# Altium PCB Template.PcbDoc
Units mil, origin at the board's own origin, x right, y up, seen from the top; angles counter-clockwise.
Board outline 3025 x 2860 mil, 2 copper layers (Top Layer, Bottom Layer); 101 components, 46 nets, 314 pads, 0 vias.
Unrouted connection lines stored in the file: 204.
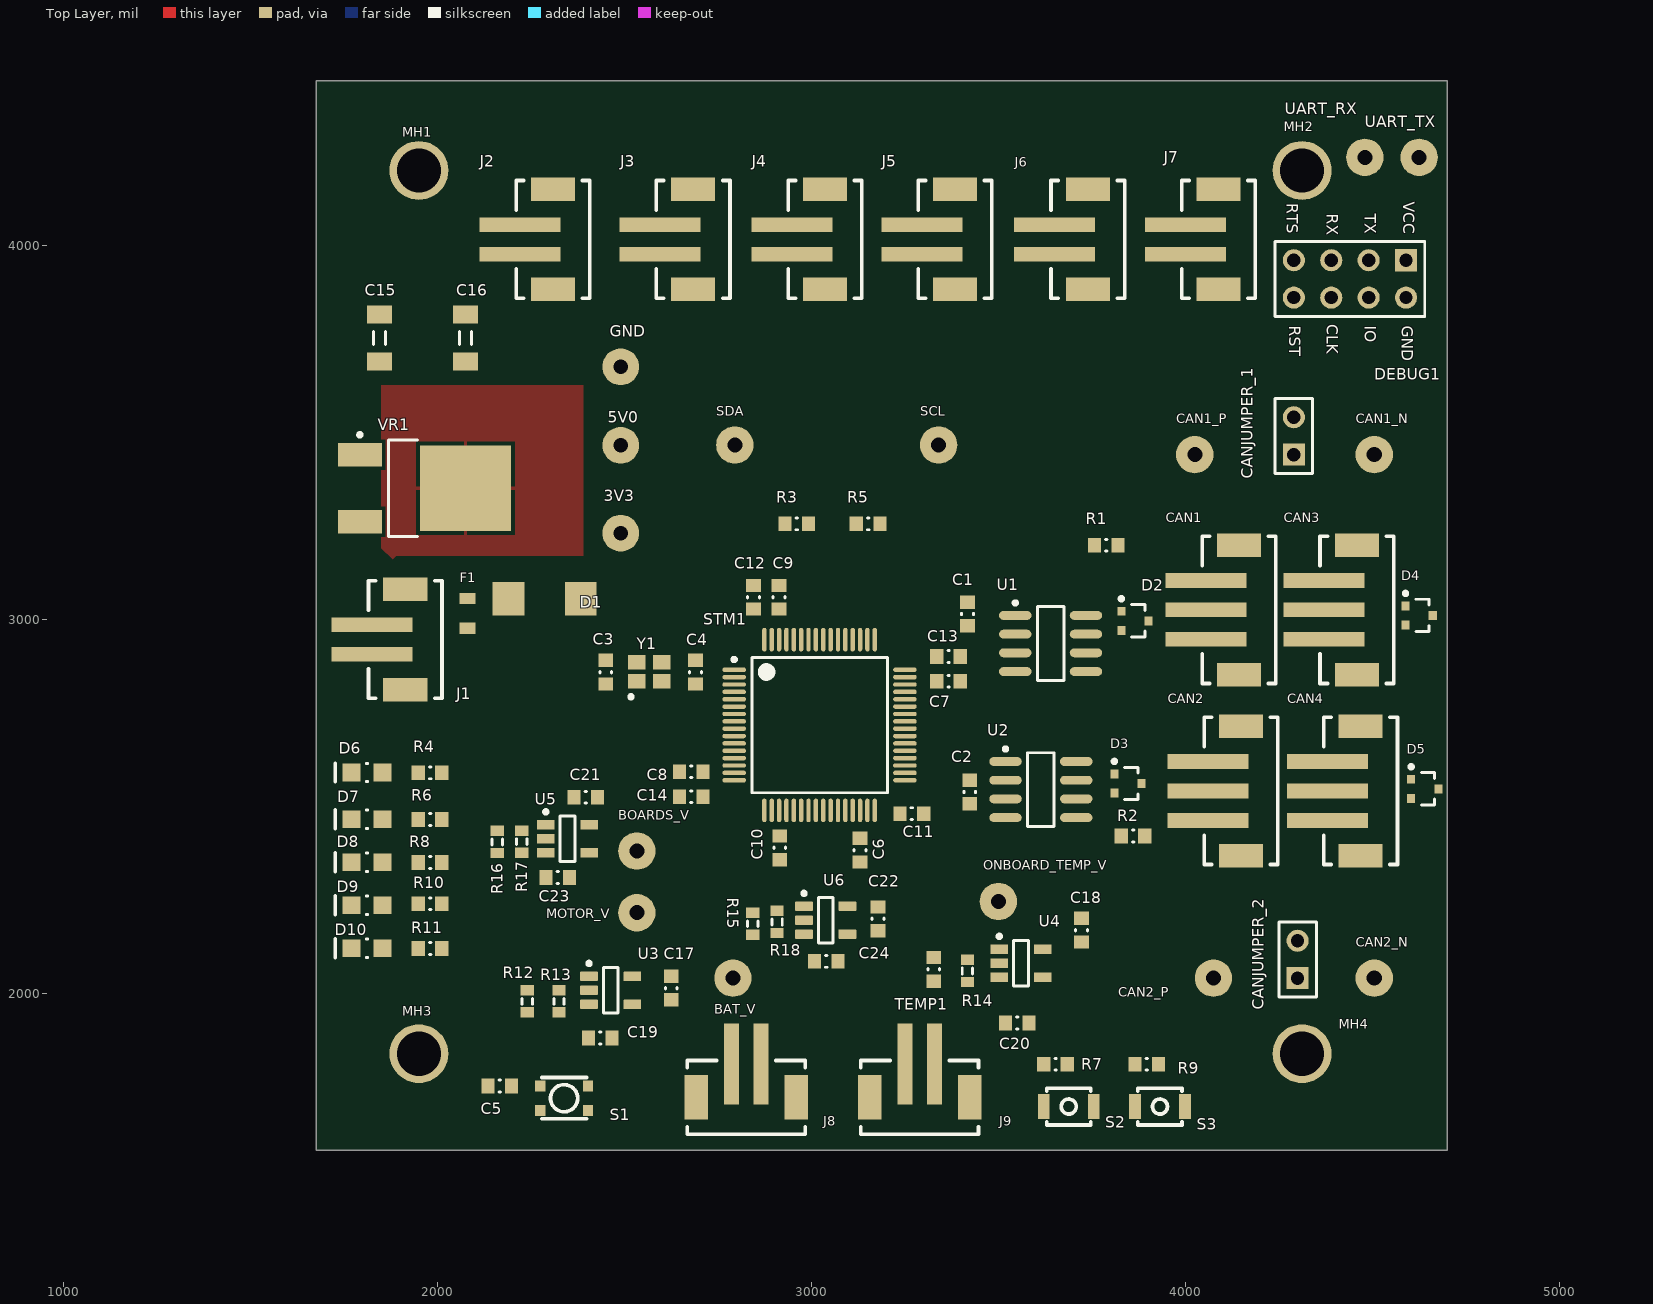
[diagram p0: Top Layer view]
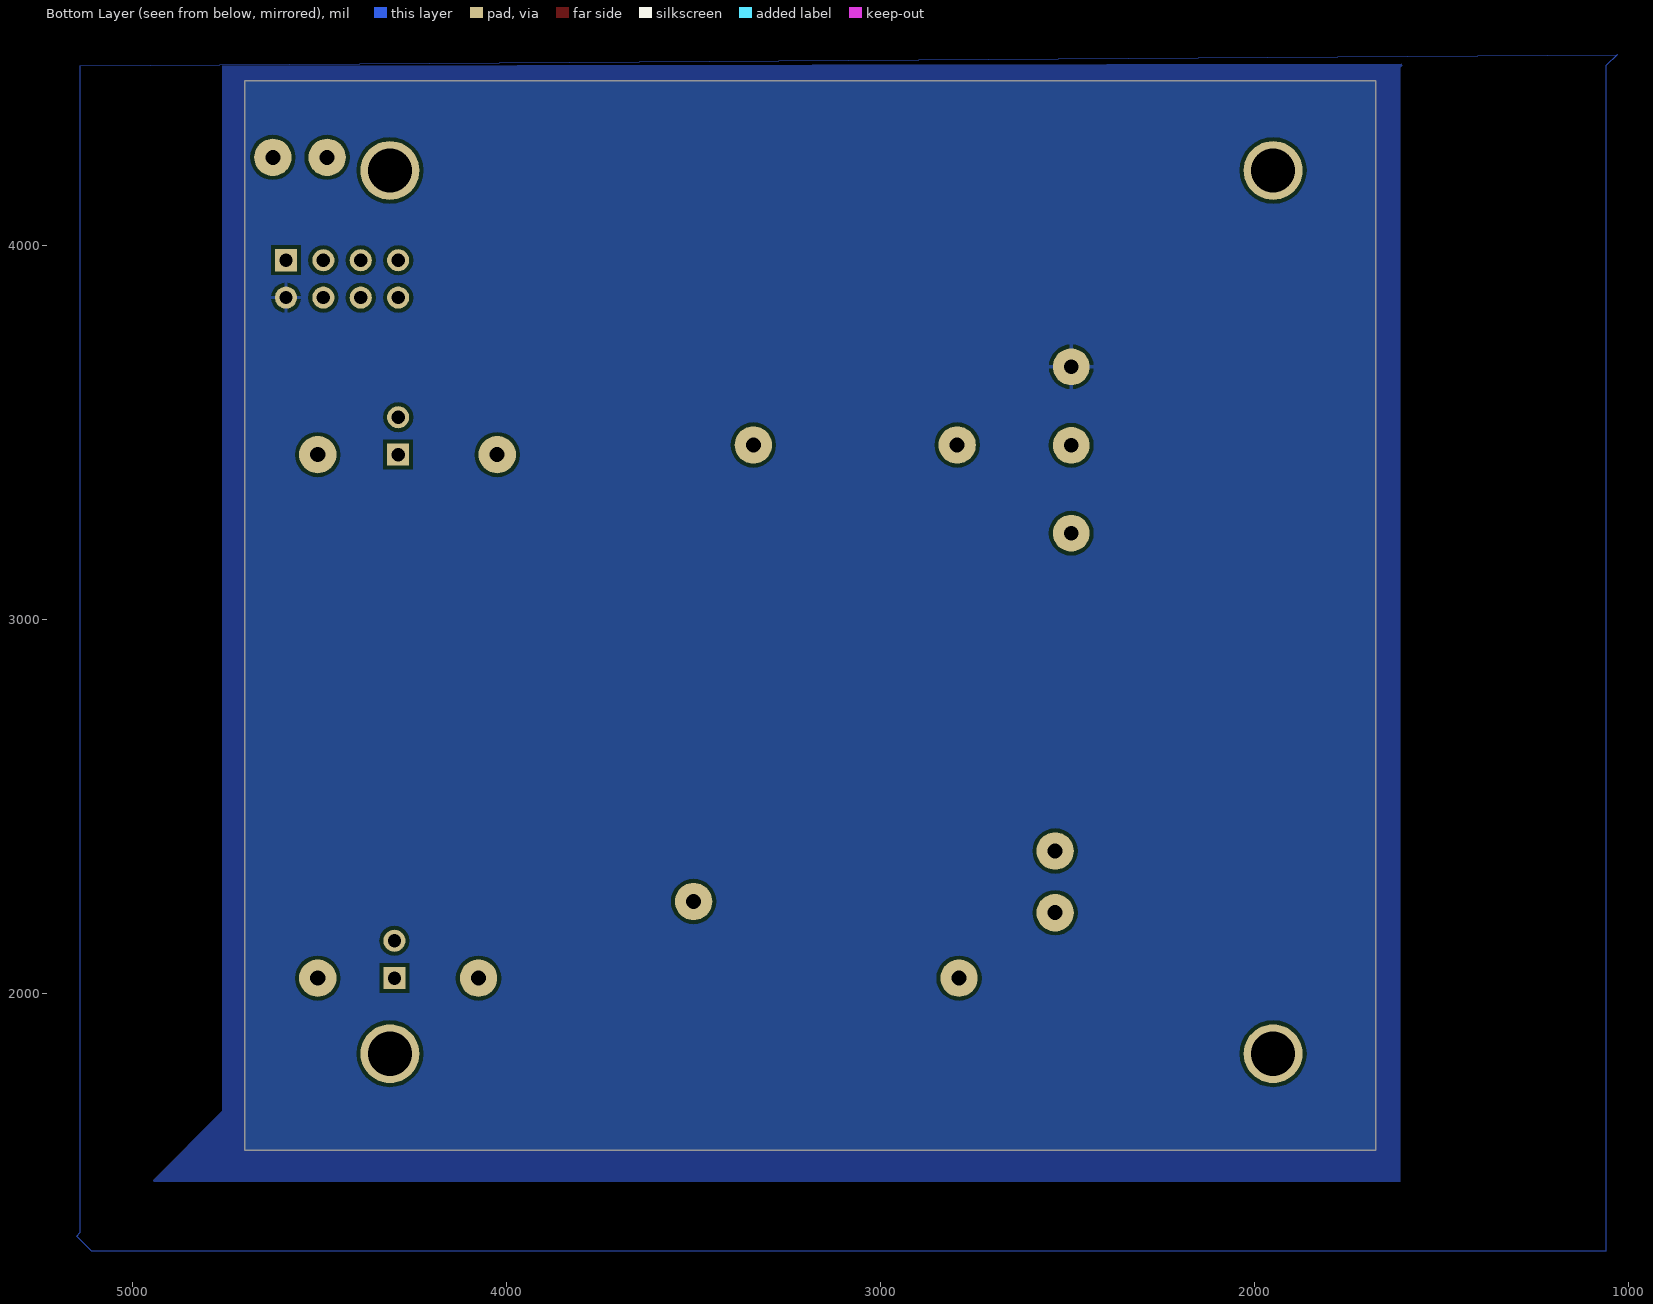
[diagram p1: Bottom Layer view, seen from below]

## Layer stack, top to bottom
Top Solder: solder mask 0.4, Solder Resist, Dk 3.5
Top Layer: signal copper 1.4
Dielectric 1: dielectric 12.6, FR-4, Dk 4.8
Bottom Layer: signal copper 1.4
Bottom Solder: solder mask 0.4, Solder Resist, Dk 3.5

## Board outline
1675,1580 4700,1580 4700,4440 1675,4440

## Design rules (kind name [scope] priority, off if disabled: settings)
Clearance [All] p1: gap=10 ignorepadtopadclearanceinfootprint=FALSE except(0: Arc-Hole Track-Hole SMDPad-Hole THPad-Hole Via-Hole Fill-Hole Poly-Hole Region-Hole Text-Hole; 5: SMDPad-SMDPad)
PolygonConnect [All] p1: connectstyle=Relief reliefconductorwidth=10 reliefentries=4 polygonreliefangle="90 Angle" airgapwidth=10
RoomDefinition POWER [InComponentClass('POWER')] p1: confinementstyle=ConfineIn formatcopy=TRUE lockcomponents=FALSE outline 705,3125 940,3125 940,3025 705,3025
RoomDefinition Connectors [InComponentClass('Connectors')] p2: confinementstyle=ConfineIn formatcopy=TRUE lockcomponents=FALSE outline 2470,690 3465,690 3465,765 2470,765
RoomDefinition Sense [InComponentClass('Sense')] p3: confinementstyle=ConfineIn formatcopy=TRUE lockcomponents=FALSE outline 5170,770 6080,770 6080,650 5170,650
RoomDefinition Support [InComponentClass('Support')] p4: confinementstyle=ConfineIn formatcopy=TRUE lockcomponents=FALSE outline 3345,395 4310,395 4310,320 3345,320
RoomDefinition MCU [InComponentClass('MCU')] p5: confinementstyle=ConfineIn formatcopy=TRUE lockcomponents=FALSE outline 2355,5150 2640,5150 2640,5021.5 2355,5021.5
RoomDefinition CAN [InComponentClass('CAN')] p6: confinementstyle=ConfineIn formatcopy=TRUE lockcomponents=FALSE outline 4780,1000 5115,1000 5115,860 4780,860
RoutingVias [All] p1: holewidth=28 width=50 viastyle="Through Hole" minholewidth=28 minwidth=50 maxholewidth=28 maxwidth=50
SolderMaskExpansion [All] p1: expansion=4
Width [All] p1: maxlimit=10 minlimit=6 preferedwidth=10 minimp=50.000000 maximp=50.000000 favimp=50.000000
30 further rules are at their usual default settings.

## Classes and differential pairs
component class Sense: BAT_V BOARDS_V C17 C18 C19 C20 C21 C22 C23 C24 MOTOR_V ONBOARD_TEMP_V R12 R13 R14 R15 R16 R17 R18 TEMP1 U3 U4 U5 U6
component class Support: D7 D8 D9 D10 R6 R7 R8 R9 R10 R11 S2 S3 UART_RTS
component class Power: 3V3 3v3 5V0 C15 C16 D6 GND R4 VR1
component class MCU: C3 C4 C5 C6 C7 C8 C9 C10 C11 C12 C13 C14 R3 R5 S1 SCL SDA STM1 UART_RX UART_TX Y1
component class Connectors: CAN1 CAN2 CAN3 CAN4 D1 D2 D3 D4 D5 DEBUG1 F1 J1 J2 J3 J4 J5 J6 J7 J8 J9
component class CAN: C1 C2 CAN1_N CAN1_P CAN2_N CAN2_P CANJUMPER_1 CANJUMPER_2 R1 R2 U1 U2

## Components (designator, comment, footprint, x,y, rotation, side; value= is the part's Value field where it differs from the comment)
3V3 "3v3" TESTPOINT_LOOP#1 2490,3230 r0 top
5V0 "5V0" TESTPOINT_LOOP#1 2490,3465 r0 top
BAT_V "TESTPOINT_LOOP" TESTPOINT_LOOP#2 2790,2040 r0 top
BOARDS_V "TESTPOINT_LOOP" TESTPOINT_LOOP#2 2533.07,2380 r90 top
C1 "" CAPC0603(1608)55_N 3417.05,3013.86 r270 top value=0.1uF
C2 "" CAPC0603(1608)55_N 3423.23,2537.87 r270 top value=0.1uF
C3 "CAP_15pF_0603" CAPC0603(1608)55_N 2450,2858.5 r270 top value=15pF
C4 "CAP_15pF_0603" CAPC0603(1608)55_N 2690,2858.5 r90 top value=15pF
C5 "CAP_0.1uF_16V_0603" CAPC0603(1608)55_N 2166.5,1751.42 r0 top value=0.1uF
C6 "CAP_4.7uF_0603" CAPC0603(1608)55_N 3129.92,2382.44 r90 top value=4.7uF
C7 "CAP_0.1uF_16V_0603" CAPC0603(1608)55_N 3366.5,2833.82 r180 top value=0.1uF
C8 "CAP_1uF_16V_0603" CAPC0603(1608)55_N 2678.5,2592.2 r0 top value=1uF
C9 "CAP_0.1uF_16V_0603" CAPC0603(1608)55_N 2913.39,3058.5 r270 top value=0.1uF
C10 "CAP_0.1uF_16V_0603" CAPC0603(1608)55_N 2915,2388.5 r90 top value=0.1uF
C11 "CAP_0.1uF_16V_0603" CAPC0603(1608)55_N 3268.5,2480 r180 top value=0.1uF
C12 "CAP_4.7uF_0603" CAPC0603(1608)55_N 2845,3058.5 r270 top value=4.7uF
C13 "CAP_0.1uF_16V_0603" CAPC0603(1608)55_N 3366.5,2900 r0 top value=0.1uF
C14 "CAP_10nF_0603" CAPC0603(1608)55_N 2678.5,2525 r0 top value=10nF
C15 "10uF" CAPC1206(3216) 1845,3752.01 r90 top
C16 "10uF" CAPC1206(3216) 2075,3752.01 r90 top
C17 "" CAPC0603(1608)55_N 2625,2013.5 r90 top value=0.1uF
C18 "" CAPC0603(1608)55_N 3722.05,2168.5 r90 top value=0.1uF
C19 "" CAPC0603(1608)55_N 2435,1880 r180 top value=0.1uF
C20 "" CAPC0603(1608)55_N 3550.55,1920 r180 top value=0.1uF
C21 "" CAPC0603(1608)55_N 2396.5,2523.94 r0 top value=0.1uF
C22 "" CAPC0603(1608)55_N 3178.07,2198.5 r90 top value=0.1uF
C23 "" CAPC0603(1608)55_N 2321.5,2308.94 r180 top value=0.1uF
C24 "" CAPC0603(1608)55_N 3039.57,2085 r180 top value=0.1uF
CAN1 "CON_3M_SM4" JST-B3B-SM4-TB 4242.01,3025 r90 top
CAN1_N "ESTPOINT_LOOP" TESTPOINT_LOOP#2 4505,3440.06 r0 top
CAN1_P "ESTPOINT_LOOP" TESTPOINT_LOOP#2 4025,3440.06 r0 top
CAN2 "CON_3M_SM4" JST-B3B-SM4-TB 4247.01,2540.63 r90 top
CAN2_N "ESTPOINT_LOOP" TESTPOINT_LOOP#2 4505,2040.06 r0 top
CAN2_P "ESTPOINT_LOOP" TESTPOINT_LOOP#2 4075,2040.06 r0 top
CAN3 "CON_3M_SM4" JST-B3B-SM4-TB 4557.01,3025 r90 top
CAN4 "CON_3M_SM4" JST-B3B-SM4-TB 4567.01,2540.63 r90 top
CANJUMPER_1 "JUMPER_2" HDR1X2 4290,3440 r90 top
CANJUMPER_2 "JUMPER_2" HDR1X2 4300,2040 r90 top
D1 "TVS_DIODE_BIDIRECTIONAL" TVS_DIODE_BIDIRECTIONAL 2286.46,3055 r0 top
D2 "TVS_DIODE_CAN" NXP-SOT323-3 3865,2995.59 r0 top
D3 "TVS_DIODE_CAN" NXP-SOT323-3 3846.42,2560.59 r0 top
D4 "TVS_DIODE_CAN" NXP-SOT323-3 4625,3010 r0 top
D5 "TVS_DIODE_CAN" NXP-SOT323-3 4640,2546.26 r0 top
D6 "DIO_LED_G" LED_0805_LINE 1811.34,2590 r180 top
D7 "DIO_LED_Y" LED_0805_LINE 1811.34,2465 r180 top
D8 "DIO_LED_G" LED_0805_LINE 1811.34,2350 r180 top
D9 "DIO_LED_G" LED_0805_LINE 1811.34,2235 r180 top
D10 "DIO_LED_G" LED_0805_LINE 1811.34,2120 r180 top
DEBUG1 "HEADER 4X2" HEADER_2X4 4590,3960 r180 top
F1 "FUSE_2A_0603" FUSE_0603 2080,3015.43 r90 top
GND "GND" TESTPOINT_LOOP#1 2490,3675 r0 top
J1 "CON_2M_SM4" JST-B2B-SM4-TB 2012.01,2945.63 r90 top
J2 "CON_2M_SM4" JST-B2B-SM4-TB 2407.01,4015.63 r90 top
J3 "CON_2M_SM4" JST-B2B-SM4-TB 2782.01,4015.63 r90 top
J4 "CON_2M_SM4" JST-B2B-SM4-TB 3134.77,4015.63 r90 top
J5 "CON_2M_SM4" JST-B2B-SM4-TB 3482.01,4015.63 r90 top
J6 "CON_2M_SM4" JST-B2B-SM4-TB 3837.52,4015.63 r90 top
J7 "CON_2M_SM4" JST-B2B-SM4-TB 4187.01,4015.63 r90 top
J8 "CON_2M_SM4" JST-B2B-SM4-TB 2825.63,1622.99 r0 top
J9 "CON_2M_SM4" JST-B2B-SM4-TB 3289.37,1622.99 r0 top
MH1 "Comment" MOUNTING_HOLE#1 1700,3780 r0 top
MH2 "Comment" MOUNTING_HOLE#2 4548,3845 r0 top
MH3 "Comment" MOUNTING_HOLE#3 1970,1975 r0 top
MH4 "Comment" MOUNTING_HOLE#4 4230,1775 r0 top
MOTOR_V "TESTPOINT_LOOP" TESTPOINT_LOOP#2 2533.07,2215 r90 top
ONBOARD_TEMP_V "TESTPOINT_LOOP" TESTPOINT_LOOP#2 3500,2245 r90 top
R1 "" RESC0603(1608)_N 3788.5,3197.64 r0 top value=120R
R2 "" RESC0603(1608)_N 3860.08,2420 r0 top value=120R
R3 "RES_4K7_0603" RESC0603(1608)_N 2960.63,3255 r180 top value=4K7
R4 "RES_100R_0603" RESC0603(1608)_N 1980,2589.06 r0 top value=100R
R5 "RES_4K7_0603" RESC0603(1608)_N 3151.5,3255 r0 top value=4K7
R6 "RES_100R_0603" RESC0603(1608)_N 1980,2464.06 r180 top value=100R
R7 "RES_10K_0603" RESC0603(1608)_N 3652.64,1810 r180 top value=10K
R8 "RES_100R_0603" RESC0603(1608)_N 1980,2349.06 r180 top value=100R
R9 "RES_10K_0603" RESC0603(1608)_N 3896.5,1810 r0 top value=10K
R10 "RES_100R_0603" RESC0603(1608)_N 1980,2239.06 r180 top value=100R
R11 "RES_100R_0603" RESC0603(1608)_N 1980,2119.06 r180 top value=100R
R12 "Res3" J1-0603 2240,1978.07 r90 top value=450K
R13 "Res3" J1-0603 2324.92,1978.07 r90 top value=150K
R14 "Res3" J1-0603 3417.05,2059.53 r90 top value=130K
R15 "Res3" J1-0603 2843.07,2185.47 r90 top value=840K
R16 "Res3" J1-0603 2160,2404.41 r270 top value=400K
R17 "Res3" J1-0603 2225,2405 r90 top value=600K
R18 "Res3" J1-0603 2908.07,2190.47 r90 top value=120K
S1 "SW_PWR" PTS830GM140 2338.5,1718.94 r180 top
S2 "SW_TACTILE" B3U-1100P 3688.07,1696.61 r0 top
S3 "SW_TACTILE" B3U-1100P 3931.93,1696.61 r0 top
SCL "TESTPOINT_LOOP" TESTPOINT_LOOP#2 3340,3465.79 r0 top
SDA "TESTPOINT_LOOP" TESTPOINT_LOOP#2 2795,3465.79 r0 top
STM1 "STM32F446RET6" STM-LQFP64_L 3021.65,2717.01 r0 top
TEMP1 "NTC_THERM_100K" RESC0603(1608)_N 3327.05,2063.5 r270 top value=100K
U1 "IC TXRX CAN" LT-S8_N 3639.49,2935 r0 top
U2 "IC TXRX CAN" LT-S8_N 3613.54,2544.37 r0 top
U3 "OPA313IDBVR" DBV0005A_M 2463.07,2007.6 r0 top
U4 "OPA313IDBVR" DBV0005A_M 3560.12,2079.88 r0 top
U5 "OPA313IDBVR" DBV0005A_M 2347.6,2412.87 r0 top
U6 "OPA313IDBVR" DBV0005A_M 3038.07,2195 r0 top
UART_RX "TESTPOINT_LOOP" TESTPOINT_LOOP#2 4480,4235 r0 top
UART_TX "TESTPOINT_LOOP" TESTPOINT_LOOP#2 4625,4235 r0 top
VR1 "5V0_3V3_LDO" VOLTAGE_REGULATOR 1902.17,3350 r270 top
Y1 "CRYSTAL_32MHZ" AVX-CX2520DB32000D0GEJZ1-4_V 2566.54,2859.41 r90 top

## Footprints (in the part's own frame and the unit in brackets; to place one, negate y for a bottom-side part, rotate by r counter-clockwise, add the part's x,y. Pads: shape width x height; smd on the part's side, far side on the other; paste and mask are expansions set on the pad)
AVX-CX2520DB32000D0GEJZ1-4_V [mm] "Hand Drawn, 4-Leads,Body 2.5x2mm"
  rect 1x1.2 smd: 1(-0.65,0.85) 2(-0.65,-0.85) 3(0.65,-0.85) 4(0.65,0.85)
  silkscreen extent -1.82,1.13 -1.58,1.38, body extent -1,-1.25 1,1.25, height 0.55
B3U-1100P [mm] "TACTILE SWITCH GREY"
  rect 0.8x1.7 smd: 1(-1.7,0) 2(1.7,0)
  silkscreen extent -1.5,-1.25 1.5,1.25
CAPC0603(1608)55_N [mm] "Chip Capacitor, Body 1.6x0.8mm, Height 0.55mm, IPC Medium Density"
  rect 0.9x1 smd: 1(-0.8,0) 2(0.8,0)
  silkscreen extent -0.05,-0.4 0.05,0.4, body extent -0.87,-0.48 0.88,0.47, height 0.55
CAPC1206(3216) [mm] "Chip Capacitor, Body 3.2x1.6mm, Height 0.55mm, IPC Medium Density"
  rect 1.2x1.7 smd: 1(-1.6,0) 2(1.6,0)
  silkscreen extent -0.45,-0.4 0.45,0.4, body extent -1.6,-0.85 1.6,0.85, height 1.75
DBV0005A_M [mm] "SOT23, 5-Leads, Body 3.05x1.75mm, Pitch 0.95mm, IPC Low Density"
  rrect15% 1.2x0.65 smd: 1(-1.475,0.95) 2(-1.475,0) 3(-1.475,-0.95) 4(1.475,-0.95) 5(1.475,0.95)
  silkscreen extent -1.6,-1.55 0.5,1.95, body extent -1.42,-1.46 1.42,1.46, height 1.08
FUSE_0603 [mm] "Chip Fuse, Body 1.6x0.81mm"
  rect 0.762x1.09 smd: 1(-1.005,0) 2(1.005,0)
  body extent -0.8,-0.38 0.8,0.38, height 0.75
HDR1X2 [mm] "Connector; Header; 2 Position"
  rect 1.5x1.5 hole 0.9: 1(0,0)
  round 1.5 hole 0.9: 2(2.54,0)
  silkscreen extent -1.27,-1.27 3.81,1.27
HEADER_2X4 [mm]
  rect 1.5x1.5 hole 0.9: 1(0,0)
  round 1.5 hole 0.9: 2(2.54,0) 3(5.08,0) 4(7.62,0) 5(0,2.54) 6(2.54,2.54) 7(5.08,2.54) 8(7.62,2.54)
  silkscreen extent -1.27,-1.27 8.89,3.81
J1-0603 [mm] "Chip Resistor, Body 1.6x0.8mm, IPC High Density"
  rect 0.7x0.9 smd: 1(-0.75,0) 2(0.75,0)
  silkscreen extent -0.2,-0.35 0.2,0.35, body extent -0.85,-0.48 0.85,0.48, height 0.9
JST-B2B-SM4-TB [mm]
  rect 1x5.5 smd: 1(-1,4.75) 2(1,4.75)
  rect 1.6x3 smd: 3(-3.4,2.5) 4(3.4,2.5)
  silkscreen extent -4,0 4,5, body extent -3.97,0 3.97,7, height 6.6
JST-B3B-SM4-TB [mm]
  rect 1x5.5 smd: 1(-2,4.75) 2(0,4.75) 3(2,4.75)
  rect 1.6x3 smd: 4(-4.4,2.5) 5(4.4,2.5)
  silkscreen extent -5,0 5,5, body extent -4.97,0 4.97,7, height 6.6
LED_0805_LINE [mm] "SMD, 2-Leads, Body 2x1.25mm"
  rect 1.2x1.2 smd: 1(-1.05,0) 2(1.05,0)
  silkscreen extent -0.05,-0.63 2.16,0.64, body extent -1,-0.63 1,0.63, height 0.8
LT-S8_N [mm] "SOP, 8-Leads, Body 4.9x3.9mm, Pitch 1.27mm, IPC Medium Density"
  oval 2.2x0.6 smd: 1(-2.4,1.905) 2(-2.4,0.635) 3(-2.4,-0.635) 4(-2.4,-1.905) 5(2.4,-1.905) 6(2.4,-0.635) 7(2.4,0.635) 8(2.4,1.905)
  silkscreen extent -2.52,-2.5 0.9,2.88, body extent -2,-2.5 2,2.5, height 1.76
MOUNTING_HOLE#1 [mm]
  round 4 hole 3 unplated: 0(6.35,10.668)
MOUNTING_HOLE#2 [mm]
  round 4 hole 3 unplated: 0(-5.994,9.017)
MOUNTING_HOLE#3 [mm]
  round 4 hole 3 unplated: 0(-0.508,-3.48)
MOUNTING_HOLE#4 [mm]
  round 4 hole 3 unplated: 0(2.083,1.6)
NXP-SOT323-3 [mm] "SOT23, 3-Leads, Body 2.2x1.35mm, Pitch 0.65mm"
  rect 0.55x0.6 smd paste-1: 1(-0.925,0.65) 2(-0.925,-0.65) 3(0.925,0)
  silkscreen extent -1.05,-1.1 0.67,1.62, body extent -1.15,-1.1 1.15,1.1, height 1.1
PTS830GM140 [mm] "PWR TACTILE SWITCH (RED)"
  rect 0.7x0.75 smd: 1(-1.625,0.825) 2(1.625,0.825) 3(-1.625,-0.825) 4(1.625,-0.825)
  silkscreen extent -1.53,-1.4 1.53,1.4
RESC0603(1608)_N [mm] "Chip Resistor, Body 1.6x0.8mm, IPC Medium Density"
  rect 0.9x1 smd: 1(-0.8,0) 2(0.8,0)
  silkscreen extent -0.05,-0.4 0.05,0.4, body extent -0.85,-0.47 0.85,0.47, height 0.6
STM-LQFP64_L [mm] "QFP, 64-Leads, Body 10x10mm, Pitch 0.5mm, IPC High Density"
  oval 1.6x0.3 smd: 1(-5.8,3.75) 2(-5.8,3.25) 3(-5.8,2.75) 4(-5.8,2.25) 5(-5.8,1.75) 6(-5.8,1.25) 7(-5.8,0.75) 8(-5.8,0.25) 9(-5.8,-0.25) 10(-5.8,-0.75) 11(-5.8,-1.25) 12(-5.8,-1.75) 13(-5.8,-2.25) 14(-5.8,-2.75) 15(-5.8,-3.25) 16(-5.8,-3.75) 33(5.8,-3.75) 34(5.8,-3.25) 35(5.8,-2.75) 36(5.8,-2.25) 37(5.8,-1.75) 38(5.8,-1.25) 39(5.8,-0.75) 40(5.8,-0.25) 41(5.8,0.25) 42(5.8,0.75) 43(5.8,1.25) 44(5.8,1.75) 45(5.8,2.25) 46(5.8,2.75) 47(5.8,3.25) 48(5.8,3.75)
  oval 0.3x1.6 smd: 17(-3.75,-5.8) 18(-3.25,-5.8) 19(-2.75,-5.8) 20(-2.25,-5.8) 21(-1.75,-5.8) 22(-1.25,-5.8) 23(-0.75,-5.8) 24(-0.25,-5.8) 25(0.25,-5.8) 26(0.75,-5.8) 27(1.25,-5.8) 28(1.75,-5.8) 29(2.25,-5.8) 30(2.75,-5.8) 31(3.25,-5.8) 32(3.75,-5.8) 49(3.75,5.8) 50(3.25,5.8) 51(2.75,5.8) 52(2.25,5.8) 53(1.75,5.8) 54(1.25,5.8) 55(0.75,5.8) 56(0.25,5.8) 57(-0.25,5.8) 58(-0.75,5.8) 59(-1.25,5.8) 60(-1.75,5.8) 61(-2.25,5.8) 62(-2.75,5.8) 63(-3.25,5.8) 64(-3.75,5.8)
  silkscreen extent -5.92,-4.6 4.6,4.6, body extent -5,-5 5,5, height 1.6
TESTPOINT_LOOP#1 [mm]
  round 2.5 hole 1: 1(0,0)
TESTPOINT_LOOP#2 [mm]
  round 2.54 hole 1.02: 1(0,0)
  body extent -1.27,-1.27 1.27,1.27, height 4.57
TVS_DIODE_BIDIRECTIONAL [mm]
  rect 2.16x2.26 smd: 1(-2.45,0) 2(2.45,0)
  body extent -2.7,-1.8 2.7,1.8, height 2.27
VOLTAGE_REGULATOR [mm] "DPAK, 3-Leads, Body 6.095x6.54mm, Pitch 4.57mm"
  rect 1.6x3 smd: 1(-2.285,-2.79) 3(2.285,-2.79)
  rect 5.8x6.2 smd: 2(0,4.39)
  silkscreen extent -3.76,-2.91 3.27,1.14, body extent -3.27,-0.84 3.27,5.25, height 2.38

## Part data
3V3 5V0 GND: library part TESTPOINT_LOOP, "Loop testpoint through-hole pad"
BAT_V BOARDS_V MOTOR_V ONBOARD_TEMP_V SCL SDA UART_RX UART_TX: "Loop testpoint through-hole pad", Manufacturer="Keystone Electronics", Manufacturer Part Number 1=5002, Supplier Part Number 1=36-5002-ND, Supplier 1=Digi-Key
C1 C2 C17 C18 C19 C20 C21 C22 C23 C24: library part CAP_0.1uF_16V_0603, "CAP CER 0.1UF 16V X7R 0603", Digikey Part Number=311-1088-1-ND, Manufacturer=Yageo, MPN=CC0603KRX7R7BB104, Package="0603 (1608 Metric)", Temperature Coefficient=X7R, Voltage Rating=16V, Dimensions="0.063\" L x 0.031\" W (1.60mm x 0.80mm)"
C3 C4: "CAP CER 15PF 250V NPO 0603", Digikey Part Number=311-3282-1-ND, Manufacturer=Yageo, MPN=AC0603JRNPOYBN150, Package="0603 (1608 Metric)", Temperature Coefficient=NP0, Voltage Rating=250v, Dimensions="0.063\" L x 0.031\" W (1.60mm x 0.80mm)"
C5 C7 C9 C10 C11 C13: "CAP CER 0.1UF 16V X7R 0603", Digikey Part Number=311-1088-1-ND, Manufacturer=Yageo, MPN=CC0603KRX7R7BB104, Package="0603 (1608 Metric)", Temperature Coefficient=X7R, Voltage Rating=16V, Dimensions="0.063\" L x 0.031\" W (1.60mm x 0.80mm)"
C6 C12: "CAP CER 4.7UF 6.3V X5R 0603", Digikey Part Number=311-1521-1-ND, Manufacturer=Yageo, MPN=CC0603KRX5R5BB475, Package="0603 (1608 Metric)", Temperature Coefficient=X5R, Voltage Rating=6.3V, Dimensions="0.063\" L x 0.031\" W (1.60mm x 0.80mm)"
C8: "CAP CER 1UF 16V Y5V 0603", Digikey Part Number=311-1372-1-ND, Manufacturer=Yageo, MPN=CC0603ZRY5V7BB105, Package="0603 (1608 Metric)", Temperature Coefficient=Y5V, Voltage Rating=16V, Dimensions="0.063\" L x 0.031\" W (1.60mm x 0.80mm)"
C14: "CAP CER 10000PF 16V X7R 0603", Digikey Part Number=311-3369-1-ND, Manufacturer=Yageo, MPN=CC0603KRX7R7BB103, Package="0603 (1608 Metric)", Temperature Coefficient=X7R, Voltage Rating=16V, Dimensions="0.063\" L x 0.031\" W (1.60mm x 0.80mm)"
C15 C16: library part CAP_10uF_50V_1206, "CAP CER 10UF 50V X5R 1206", Manufacturer=Murata, MPN=GRT31CR61H106KE01L, Package="1206 (3216 Metric)", Supplier Part Number 1=490-12456-1-ND, Voltage Rating=50V, Dimensions="0.126\" L x 0.063\" W (3.20mm x 1.6mm)", Supplier 1=Digi-Key
CAN1 CAN2 CAN3 CAN4: Manufacturer=JST, Manufacturer Part Number=B3B-PH-SM4-TB(LF)(SN), Max Current Rating=2A, Max Voltage Rating=100V, Supplier Part Number 1=455-1735-1-ND, ComponentLink1Description=https://datasheet.ciiva.com/11747/0900766b80ddea81-11747684.pdf?src-supplier=RSComponents, ComponentLink1URL=https://datasheet.ciiva.com/11747/0900766b80ddea81-11747684.pdf?src-supplier=RSComponents, Pitch=2mm, Supplier 1=Digi-Key
CAN1_N CAN1_P CAN2_N CAN2_P: library part TESTPOINT_LOOP, "Loop testpoint through-hole pad", Manufacturer="Keystone Electronics", Manufacturer Part Number 1=5002, Supplier Part Number 1=36-5002-ND, Supplier 1=Digi-Key
CANJUMPER_1 CANJUMPER_2: "HEADER 2X1"
D1: "TVS DIODE 5V 9.2V DO214AA", Breakdown Voltage=6.4V, Case/Package=SMB, Clamping Voltage=9.2V, Leakage Current=1.6mA, Manufacturer="Nexperia USA Inc.", Manufacturer 1=Littelfuse, Manufacturer Part Number 1=SMBJ5.0CA, Max Breakdown Voltage=7V, Max Operating Temperature=150°C, Max Power Dissipation=5W, Max Surge Current=65.3A, Min Operating Temperature=-65°C, MPN=PESD2CAN,215, Operating Supply Voltage=5V, Package="SC-70, SOT-323", Package Quantity=3000, Peak Pulse Power=600W, Power Line Protection=No, Supplier Part Number 1=1727-3891-1-ND, Test Current=10mA, ComponentLink1Description=Datasheet, ComponentLink1URL=https://www.littelfuse.com/~/media/electronics/datasheets/tvs_diodes/littelfuse_tvs_diode_smbj_datasheet.pdf.pdf, Composition=Zener, Direction=Bidirectional, Element Configuration=Single, ESD Protection=Yes, Height=0.096inch, Lead Free="Lead Free", Length=0.179inch, Max Reverse Leakage Current=1.6mA, Min Breakdown Voltage=6.4V, Mount="Surface Mount", Number of Bidirectional Channels=1, Number of Channels=1, Number of Elements=1, Number of Pins=2, Packaging="Tape and Reel", Peak Pulse Current=65.3A, Polarity=Bidirectional, Power Dissipation=600W, Pricing 1="1=0.39000, 10=0.31300, 25=0.28640, 100=0.17980, 250=0.17784, 500=0.16650, 1000=0.11322 (USD)", Radiation Hardening=No, REACH SVHC="No SVHC", Reverse Breakdown Voltage=6.4V, Reverse Standoff Voltage=5V, Stock 1=23233, Supplier 1=Digi-Key, Termination=SMD/SMT, Voltage Rating (DC)=5V, Width=0.155inch
D2 D3 D4 D5: "TVS DIODE 24V 41V SOT323-3", Manufacturer="Nexperia USA Inc.", Manufacturer Part Number=PESD2CAN,215, Package="SC-70, SOT-323", Supplier Part Number 1=1727-3891-1-ND, ComponentLink1Description=Datasheet, ComponentLink1URL=https://assets.nexperia.com/documents/data-sheet/PESD1CAN-U.pdf, Supplier 1=Digi-Key
D6 D8 D9 D10: "LED GREEN DIFFUSED 0805 SMD", Digikey Part Number=475-1410-1-ND, Forward Voltage Drop=2.2V, Manufacturer=OSRAM, MPN="LG R971-KN-1", Package="0805 (2012 Metric)"
D7: "LED YELLOW DIFFUSED 0805 SMD", Digikey Part Number=475-2560-1-ND, Forward Voltage Drop=2.2V, Manufacturer=OSRAM, MPN="LY R976-PS-36", Package="0805 (2012 Metric)"
DEBUG1: "Header, 4-Pin Dual row", Digikey Part Number=S9015E-04-ND, Manufacturer="Sullins Connector Solutions", MPN=GRPB042VWVN-RC
F1: "FUSE SMD 2A 32V", Current Rating=2A, Supplier Part Number 1=F7132CT-ND, Voltage Rating (AC)=32V, ComponentLink1Description=https://datasheet.ciiva.com/303/467-303400.pdf?src-supplier=Digi-Key, ComponentLink1URL=https://datasheet.ciiva.com/303/467-303400.pdf?src-supplier=Digi-Key, ComponentLink2Description=http://datasheet.octopart.com/0467002.NRHF-Littelfuse-datasheet-32023482.pdf?src-supplier=Future+Electronics, ComponentLink2URL=http://datasheet.octopart.com/0467002.NRHF-Littelfuse-datasheet-32023482.pdf?src-supplier=Future+Electronics, ComponentLink3Description=http://datasheet.octopart.com/0467002.NRHF-Littelfuse-datasheet-136509808.pdf?src-supplier=Future+Electronics, ComponentLink3URL=http://datasheet.octopart.com/0467002.NRHF-Littelfuse-datasheet-136509808.pdf?src-supplier=Future+Electronics, Mount="Surface Mount", Supplier 1=Digi-Key, Supplier Packaging 1="Cut Tape", Voltage Rating (DC)=32V
J1 J2 J3 J4 J5 J6 J7 J8 J9: Manufacturer=JST, Manufacturer Part Number=B2B-PH-SM4-TB(LF)(SN), Max Current Rating=2A, Max Voltage Rating=100V, Supplier Part Number 1=455-1734-1-ND, ComponentLink1Description=https://datasheet.ciiva.com/11748/0900766b80ddea81-11748001.pdf?src-supplier=RSComponents, ComponentLink1URL=https://datasheet.ciiva.com/11748/0900766b80ddea81-11748001.pdf?src-supplier=RSComponents, ComponentLink2Description=https://datasheet.ciiva.com/16216/b2b-ph-sm4-tblfsn-16216102.pdf?src-supplier=Future+Electronics, ComponentLink2URL=https://datasheet.ciiva.com/16216/b2b-ph-sm4-tblfsn-16216102.pdf?src-supplier=Future+Electronics, ComponentLink3Description=https://datasheet.ciiva.com/8052/80567-8052023.pdf?src-supplier=Element14, ComponentLink3URL=https://datasheet.ciiva.com/8052/80567-8052023.pdf?src-supplier=Element14, ComponentLink4Description=https://datasheet.ciiva.com/712/eph-712504.pdf?src-supplier=Digi-Key, ComponentLink4URL=https://datasheet.ciiva.com/712/eph-712504.pdf?src-supplier=Digi-Key, ComponentLink5Description=https://datasheet.ciiva.com/712/eph-712505.pdf?src-supplier=Digi-Key, ComponentLink5URL=https://datasheet.ciiva.com/712/eph-712505.pdf?src-supplier=Digi-Key, ComponentLink6Description=https://datasheet.ciiva.com/712/eph-712506.pdf?src-supplier=Digi-Key, ComponentLink6URL=https://datasheet.ciiva.com/712/eph-712506.pdf?src-supplier=Digi-Key, Pitch=2mm, Supplier 1=Digi-Key
R1 R2: library part RES_120R_0603, "RES SMD 120 OHM 5% 1/10W 0603", Digikey Part Number=311-120GRCT-ND, Manufacturer=Yageo, MPN=RC0603JR-07120RL, Package="0603 (1608 Metric)", Tolerance=5%, Dimensions="0.063\" L x 0.031\" W (1.60mm x 0.80mm)"
R3 R5: "RES SMD 4.7K OHM 5% 1/10W 0603", Digikey Part Number=311-4.7KGRCT-ND, Manufacturer=Yageo, MPN=RC0603JR-074K7L, Package="0603 (1608 Metric)", Tolerance=5%, Dimensions="0.063\" L x 0.031\" W (1.60mm x 0.80mm)"
R4 R6 R8 R10 R11: "RES SMD 100 OHM 1% 1/10W 0603", Digikey Part Number=311-100HRCT-ND, Manufacturer=Yageo, MPN=RC0603FR-07100RL, Package="0603 (1608 Metric)", Tolerance=1%, Dimensions="0.063\" L x 0.031\" W (1.60mm x 0.80mm)"
R7 R9: "RES SMD 10K OHM 5% 1/10W 0603", Digikey Part Number=311-10KGRCT-ND, Manufacturer=Yageo, MPN=RC0603JR-0710KL, Package="0603 (1608 Metric)", Tolerance=5%, Dimensions="0.063\" L x 0.031\" W (1.60mm x 0.80mm)"
R12 R13 R14 R15 R16 R17 R18: "Resistor", LatestRevisionDate=29-May-2009, LatestRevisionNote="IPC-7351 Footprint Added.", PackageDescription="Chip Resistor", PackageReference=J1-0603, Published=8-Jun-2000, Publisher="Altium Limited"
S1: "Power Switch (Red)", Digikey Part Number=CKN10587CT-ND, Manufacturer=C&K, MPN="PTS830GM140 SMTR LFS", ComponentLink1Description=Datasheet, ComponentLink1URL=https://www.ckswitches.com/media/1478/pts830.pdf
S2 S3: "Tactile Switch (Grey)", Digikey Part Number=SW1021TR-ND, Manufacturer="Omron Electronics Inc-EMC Div", MPN=B3U-1100P
STM1: library part MCU_STM32F446RET6, "ARM Cortex-M4 32-bit MCU+FPU, 512 KB Flash, 128 KB Internal RAM, 50 I/Os, 64-Pin LQFP, -40 to 85 degC, Tray", I/Os (High Current)=50, Operating Frequency(F) (Processor speed) (MHz)=180, Package Description=LQFP64, Package Reference="64-Pin Low-profile Quad Flat Package, Body 10 x 10 mm, Pitch 0.5 mm", Supply Voltage(Vcc) min (V)=1.7, ComponentLink1Description="Manufacturer URL", ComponentLink1URL=http://www.st.com/, ComponentLink2Description=Datasheet, ComponentLink2URL=http://www.st.com/st-web-ui/static/active/en/resource/technical/document/datasheet/DM00141306.pdf, Core="ARM Cortex-M4", D/A Converter=2, DatasheetVersion="Rev. 6", FLASH Size (Prog) (kB)=512, Internal RAM Size (kB)=128, Mounting Technology="Surface Mount", Packing=Tray
TEMP1: "THERM NTC 100KOHM 4700K 0603", Digikey Part Number=P10555CT-ND, Manufacturer=Panasonic, MPN=ERT-J1VV104J
U1 U2: library part LTC2875, "IC TXRX CAN 4MBPS 8SO", Digikey Part Number=LTC2875IS8#PBF-ND, Manufacturer="Linear Technologies", MPN=LTC2875IS8#PBF, Package="8-SOIC (0.154\", 3.90mm Width)", ComponentLink1Description=Datasheet, ComponentLink1URL=https://www.analog.com/media/en/technical-documentation/data-sheets/2875f.pdf
U3 U4 U5 U6: library part OPAMP, "1-MHz, Micropower, Low-Noise, Rail-to-Rail I/O Operational Amplifier, 1.8 to 5.5 V, -40 to 125 degC, 5-pin SOT23 (DBV5), Green (RoHS & no Sb/Br)", Digi-Key Part Number=296-35607-1-ND, Manufacturer="Texas Instruments", Rating=Catalog, Total Supply Voltage(Max)(+5V is 5, +/-5V is 10)=5.5, Total Supply Voltage(Min)(+5V is 5, +/-5V is 10)=1.8, CMRR(Min)(dB)=70, Code_JEDEC=MO-178, ComponentLink1Description="Manufacturer URL", ComponentLink1URL=http://www.ti.com/, ComponentLink2Description=Datasheet, ComponentLink2URL=http://www.ti.com/lit/ds/symlink/opa313.pdf, ComponentLink3Description="Package Specification", ComponentLink3URL=http://www.ti.com/litv/pdf/mpds018i, DatasheetVersion=SBOS649C, Eco-Plan="Green (RoHS & no Sb/Br)", GBW(Typ)(MHz)=1, Iq per channel(Max)(mA)=0.06, Mounting Technology="Surface Mount", Number of Channels=1, Offset Drift(Typ)(uV/C)=2, PackageDescription="5-Pin Plastic Small Outline, Body 1.6 x 2.9 mm, Pitch 0.95 mm", PackageReference=DBV0005A, PackageVersion="4073253-4/K, 03/2006", Packing="LARGE T&R", PartNumber=OPA313IDBVR, Slew Rate(Typ)(V/us)=0.5, SubFamily="Low Input Bias Current Amp (<=10pA), Low Power Amp (<=500uA)", Vio (25C)(Max)(mV)=2.5
VR1: "IC REG LINEAR 3.3V 1A DPAK", Current Output=1A, Manufacturer="ON Semiconductor", Part Number=NCP1117DT33T5G
Y1: "CRYSTAL 32MHZ 8PF SMD", Digikey Part Number=1253-1730-1-ND, Manufacturer="Kyocera International Inc. Electronic Components", MPN=CX2520DB32000D0GPSC1, Package="4-SMD, No Lead", Dimensions="0.098\" L x 0.079\" W (2.50mm x 2.00mm)"

## Nets (pads, with @x,y where several pads share a name; then routed paths per layer and width w, separated by ;. In a path a pad name is that pad's centre, name@x,y a point inside that pad or via, vN(x,y) a via of type N, cw(c..) or ccw(c..) an arc to the next point about the centre after c; other vN are vias at no path point)
+3V3: 3V3.1 C1.2 C2.2 C7.2 C8.2 C9.2 C10.2 C11.2 C12.2 C13.2 C14.2 C16.1 C17.2 C18.1 C21.2 C22.2 DEBUG1.1 R3.2 R4.2 R5.2 R7.1 R9.2 STM1.1 STM1.13 STM1.19 STM1.32 STM1.48 STM1.64 U1.3 U2.3 U3.5 U4.5 U5.5 U6.5 VR1.3
+5V0: 5V0.1 C15.1 F1.2 R16.1 TEMP1.1 VR1.1
GND: C1.1 C2.1 C3.1 C4.1 C5.1 C6.1 C7.1 C8.1 C9.1 C10.1 C11.1 C12.1 C13.1 C14.1 C15.2 C16.2 C17.1 C18.2 C19.1 C20.1 C21.1 C22.1 C23.1 C24.1 CAN1.3 CAN2.3 CAN3.3 CAN4.3 D1.2 D2.3 D3.3 D4.3 D5.3 D6.2 D7.2 D8.2 D9.2 D10.2 DEBUG1.5 GND.1 J1.2 J8.2 J9.2 R13.2 R14.2 R17.2 R18.2 S1.1 S2.2 S3.2 STM1.12 STM1.18 STM1.31 STM1.47 STM1.63 U1.2 U1.8 U2.2 U2.8 U3.2 U4.2 U5.2 U6.2 VR1.2 Y1.2
NetBAT_V_1: BAT_V.1 STM1.17 U6.1 U6.4
NetBOARDS_V_1: BOARDS_V.1 STM1.15 U5.1 U5.4
NetC3_2: C3.2 STM1.6 Y1.1
NetC4_2: C4.2 STM1.5 Y1.3
NetC5_2: C5.2 DEBUG1.8 S1.4 STM1.7
NetC6_2: C6.2 STM1.30
NetC19_2: C19.2 R12.2 R13.1 U3.3
NetC20_2: C20.2 R14.1 TEMP1.2 U4.3
NetC23_2: C23.2 R16.2 R17.1 U5.3
NetC24_2: C24.2 R15.2 R18.1 U6.3
NetCAN1_1: CAN1.1 CAN1_P.1 CAN3.1 D2.2 D4.2 R1.1 U1.7
NetCAN1_2: CAN1.2 CAN1_N.1 CAN3.2 CANJUMPER_1.1 D2.1 D4.1 U1.6
NetCAN2_1: CAN2.1 CAN2_P.1 CAN4.1 D3.2 D5.2 R2.1 U2.7
NetCAN2_2: CAN2.2 CAN2_N.1 CAN4.2 CANJUMPER_2.1 D3.1 D5.1 U2.6
NetCANJUMPER_1_2: CANJUMPER_1.2 R1.2
NetCANJUMPER_2_2: CANJUMPER_2.2 R2.2
NetD1_1: D1.1 F1.1 J1.1
NetD6_1: D6.1 R4.1
NetD7_1: D7.1 R6.2
NetD8_1: D8.1 R8.2
NetD9_1: D9.1 R10.2
NetD10_1: D10.1 R11.2
NetDEBUG1_2: DEBUG1.2 STM1.51 UART_TX.1
NetDEBUG1_3: DEBUG1.3 STM1.52 UART_RX.1
NetDEBUG1_4: DEBUG1.4 STM1.50
NetDEBUG1_6: DEBUG1.6 STM1.46
NetDEBUG1_7: DEBUG1.7 STM1.49
NetJ2_1: J2.1 J3.1 J4.1 J5.1 J6.1 J7.1 R3.1 SDA.1 STM1.62
NetJ2_2: J2.2 J3.2 J4.2 J5.2 J6.2 J7.2 R5.1 SCL.1 STM1.61
NetJ8_1: J8.1 R12.1
NetJ9_1: J9.1 R15.1
NetMOTOR_V_1: MOTOR_V.1 STM1.16 U3.1 U3.4
NetONBOARD_TEMP_V_1: ONBOARD_TEMP_V.1 STM1.20 U4.1 U4.4
NetR6_1: R6.1 STM1.8
NetR7_2: R7.2 S2.1 STM1.26
NetR8_1: R8.1 STM1.9
NetR9_1: R9.1 S3.1 STM1.27
NetR10_1: R10.1 STM1.10
NetR11_1: R11.1 STM1.11
NetSTM1_33: STM1.33 U2.4
NetSTM1_34: STM1.34 U2.1
NetSTM1_44: STM1.44 U1.4
NetSTM1_45: STM1.45 U1.1
pads on no net: CAN1.4 CAN1.5 CAN2.4 CAN2.5 CAN3.4 CAN3.5 CAN4.4 CAN4.5 J1.3 J1.4 J2.3 J2.4 J3.3 J3.4 J4.3 J4.4 J5.3 J5.4 J6.3 J6.4 J7.3 J7.4 J8.3 J8.4 J9.3 J9.4 MH1.0 MH2.0 MH3.0 MH4.0 S1.2 S1.3 STM1.2 STM1.3 STM1.4 STM1.14 STM1.21 STM1.22 STM1.23 STM1.24 STM1.25 STM1.28 STM1.29 STM1.35 STM1.36 STM1.37 STM1.38 STM1.39 STM1.40 STM1.41 STM1.42 STM1.43 STM1.53 STM1.54 STM1.55 STM1.56 STM1.57 STM1.58 STM1.59 STM1.60 U1.5 U2.5 Y1.4

## Polygon pours and split planes (outlines as drawn)
GND on Bottom Layer (solid, pour order 14): 1600,4485 1610,4475 1610,1495 4950,1495 4760,1685 4760,4480
GND on Bottom Layer "Bottom Layer-GND" (solid, shelved, pour order 12): 1030,4510 1060,4480 1060,1310 5110,1310 5150,1350 5140,1360 5140,4480
no net on Bottom Layer "Bottom Layer-No Net" (solid, pour order 4): 780,5270
no net on Bottom Layer "Bottom Layer-No Net 1" (solid, pour order 2): 1440,6170
GND on Top Layer (solid, pour order 16): 1850,3625 1850,3190 1880,3160 1890,3170 2390,3170 2390,3625

## Other copper
Top Layer:
  pour cut-out: 2045,4040
Bottom Layer:
  pour cut-out: 1740,3842.62

## Text inside footprints (layer, text, board x,y; h text height)
DEBUG1: Top Overlay "TX" at 4479.76,4084.09 h30 r270; Top Overlay "RX" at 4377.4,4084.09 h30 r270; Top Overlay "RTS" at 4271.1,4112.72 h30 r270; Top Overlay "IO" at 4479.76,3784.96 h30 r270; Top Overlay "CLK" at 4377.4,3788.9 h30 r270; Top Overlay "RST" at 4278.19,3784.96 h30 r270; Top Overlay "VCC" at 4582.13,4115.67 h30 r270; Top Overlay "GND" at 4578.19,3784.96 h30 r270